# EAGLE board 130730_ReceiverSTM_0_0 (EAGLE 6.1)
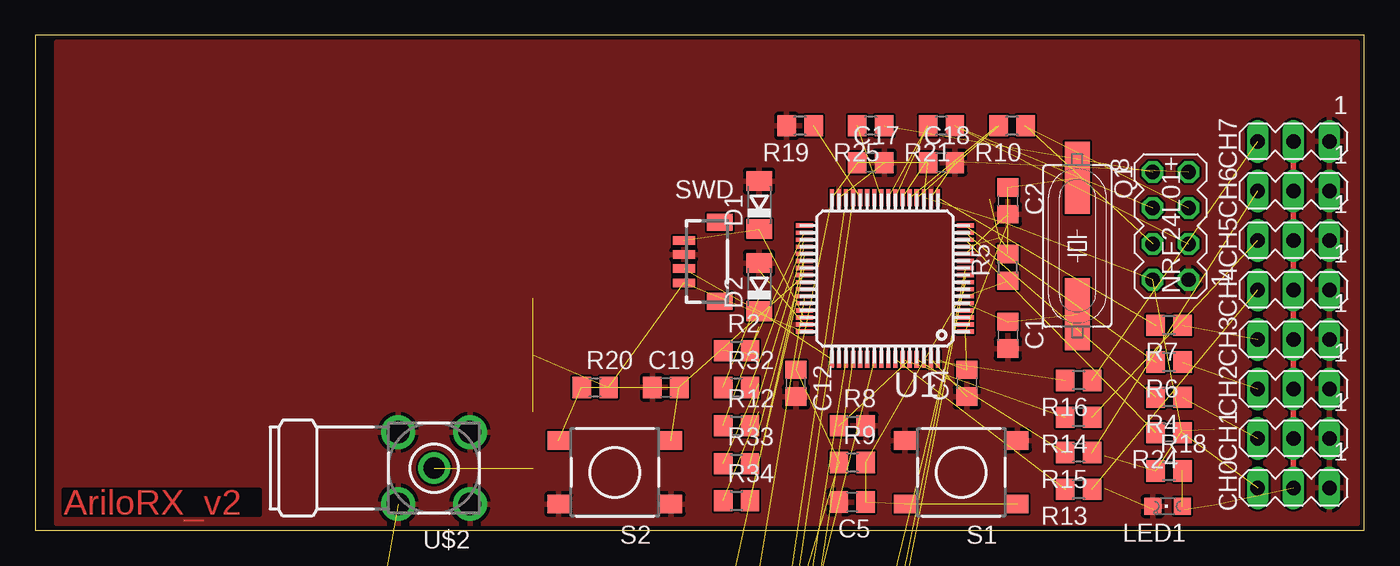
[diagram p0: board, top side]
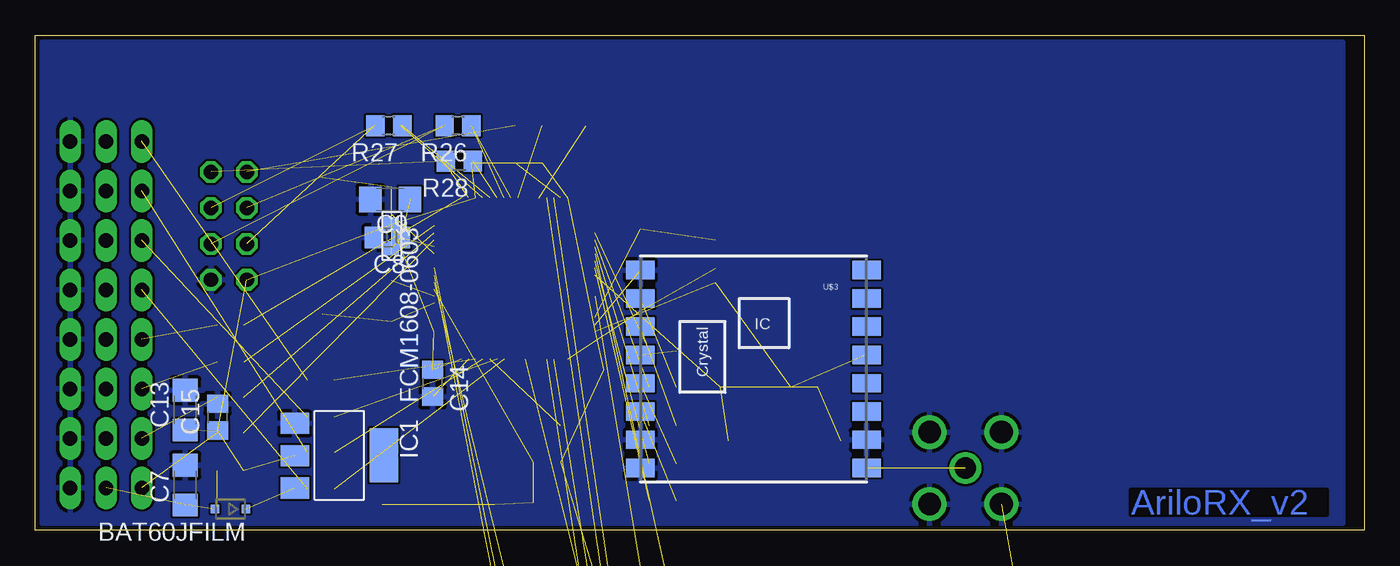
[diagram p1: board, bottom side, seen from below]

Size 94 x 35 mm. Coordinates in mm from the lower left corner, seen from the top.
Outline: 0,0 94,0 94,35 0,35 0,0
Copper layers (1*16): Top 0.035mm / dielectric 1.5mm / Bottom 0.035mm
Design rules: minimum track width 6mil, minimum drill 12mil, track to track 6mil, track to pad 6mil, pad to pad 6mil, via to via 6mil, smd to smd 0mil, copper to edge 10mil, drill to drill 10mil, minimum pad ring 10mil, minimum via ring 6mil, stop-mask expansion 2mil, vias tented up to drill 100mil, thermal gap 10mil

## Footprints (pad centres in the part's own frame; a part is rotated, then mirrored left to right if it is on the bottom)
SOT23-BEC = smd 1 x 1.4: B -0.95,-1.1; C 0,1.1; E 0.95,-1.1
SOD323-R = smd 0.6 x 0.6: A 1.1,0; C -1.1,0
C0805 = smd 1.3 x 1.5: 1 -0.95,0; 2 0.95,0
C3216 = smd 1.6 x 1.8: 1 -1.4,0; 2 1.4,0
MA03-1 = drill 1.016 long: 1 -2.54,0; 2 0,0; 3 2.54,0
SOD80C = smd 1.4 x 1.8: A 1.7,0; C -1.7,0
R0603 = smd 1 x 1.1: 1 -0.85,0; 2 0.85,0
BM03B-SRSS-TB = smd 0.6 x 1.55: 1 1,-1.625; 2 0,-1.625; 3 -1,-1.625 | smd 1.2 x 1.8: FIT@1 2.3,0.9; FIT@2 -2.3,0.9
BM05B-SRSS-TB = smd 0.6 x 1.55: 1 2,-1.625; 2 1,-1.625; 3 0,-1.625; 4 -1,-1.625; 5 -2,-1.625 | smd 1.2 x 1.8: FIT@1 3.3,0.9; FIT@2 -3.3,0.9
SOT223 = smd 1.499 x 2.007: 1 -2.261,-3.15; 2 0.025,-3.15; 3 2.311,-3.15 | smd 3.81 x 2.007: 4 0,3.15
CHIPLED_0805 = smd 1.2 x 1.2: A 0,-1.05; C 0,1.05
BM07B-SRSS-TB = smd 0.6 x 1.55: 1 3,-1.625; 2 2,-1.625; 3 1,-1.625; 4 0,-1.625; 5 -1,-1.625; 6 -2,-1.625; 7 -3,-1.625 | smd 1.2 x 1.8: FIT@1 4.3,0.9; FIT@2 -4.3,0.9
MA04-2 = drill 1.016 octagon: 1 -3.81,-1.27; 2 -3.81,1.27; 3 -1.27,-1.27; 4 -1.27,1.27; 5 1.27,-1.27; 6 1.27,1.27; 7 3.81,-1.27; 8 3.81,1.27
SM49 = smd 5.08 x 1.778: 1 -4.826,0; 2 4.826,0
R0805 = smd 1.3 x 1.5: 1 -0.95,0; 2 0.95,0
DTSM-6 = smd 1.55 x 1.3: 1 -3.975,2.25; 2 3.975,2.25; 3 -3.975,-2.25; 4 3.975,-2.25
BM04B-SRSS-TB = smd 0.6 x 1.55: 1 1.5,-1.625; 2 0.5,-1.625; 3 -0.5,-1.625; 4 -1.5,-1.625 | smd 1.2 x 1.8: FIT@1 2.8,0.9; FIT@2 -2.8,0.9
TQFP64 = smd 1.2 x 0.3: 1 -5.7,3.75; 2 -5.7,3.25; 3 -5.7,2.75; 4 -5.7,2.25; 5 -5.7,1.75; 6 -5.7,1.25; 7 -5.7,0.75; 8 -5.7,0.25; 9 -5.7,-0.25; 10 -5.7,-0.75; 11 -5.7,-1.25; 12 -5.7,-1.75; 13 -5.7,-2.25; 14 -5.7,-2.75; 15 -5.7,-3.25; 16 -5.7,-3.75; 33 5.7,-3.75; 34 5.7,-3.25; 35 5.7,-2.75; 36 5.7,-2.25; 37 5.7,-1.75; 38 5.7,-1.25; 39 5.7,-0.75; 40 5.7,-0.25; 41 5.7,0.25; 42 5.7,0.75; 43 5.7,1.25; 44 5.7,1.75; 45 5.7,2.25; 46 5.7,2.75; 47 5.7,3.25; 48 5.7,3.75 | smd 0.3 x 1.2: 17 -3.75,-5.7; 18 -3.25,-5.7; 19 -2.75,-5.7; 20 -2.25,-5.7; 21 -1.75,-5.7; 22 -1.25,-5.7; 23 -0.75,-5.7; 24 -0.25,-5.7; 25 0.25,-5.7; 26 0.75,-5.7; 27 1.25,-5.7; 28 1.75,-5.7; 29 2.25,-5.7; 30 2.75,-5.7; 31 3.25,-5.7; 32 3.75,-5.7; 49 3.75,5.7; 50 3.25,5.7; 51 2.75,5.7; 52 2.25,5.7; 53 1.75,5.7; 54 1.25,5.7; 55 0.75,5.7; 56 0.25,5.7; 57 -0.25,5.7; 58 -0.75,5.7; 59 -1.25,5.7; 60 -1.75,5.7; 61 -2.25,5.7; 62 -2.75,5.7; 63 -3.25,5.7; 64 -3.75,5.7
BU-SMA-H = drill 1.5: 1 0,0 | drill 1.6: 2 -2.54,2.54; 3 2.54,2.54; 4 2.54,-2.54; 5 -2.54,-2.54
RFM22-XXX-S2 = smd 2 x 1.3: 1 -8,7; 2 -8,5; 3 -8,3; 4 -8,1; 5 -8,-1; 6 -8,-3; 7 -8,-5; 8 -8,-7; 9 8,-7; 10 8,-5; 11 8,-3; 12 8,-1; 13 8,1; 14 8,3; 15 8,5; 16 8,7

## Placement (x,y rotation side)
2N2222  [SOT23-BEC]  -20.7,-435.9 0 top  (outside the outline)
BAT60JFILM  [SOD323-R]  80.2,1.5 180 bottom
C1  20pF  [C0805]  68.8,13.8 270 top
C2  20pF  [C0805]  68.8,23.3 270 top
C4  100nF  [C0805]  65.9,10.4 90 top
C5  100nF  [C0805]  57.8,2 180 top
C6  100nF  [C0805]  -21.1,-256.7 0 top  (outside the outline)
C7  10uF  [C3216]  83.4,3.2 90 bottom
C8  100nF  [C0805]  69.1,20.7 180 bottom
C9  1uF  [C3216]  68.9,23.4 180 bottom
C10  4.7nF  [C0805]  -21.1,-299.4 0 top  (outside the outline)
C11  4.7nF  [C0805]  -21.1,-305.5 0 top  (outside the outline)
C12  100nF  [C0805]  53.8,10.4 270 top
C13  10uF  [C3216]  83.4,8.5 90 bottom
C14  100nF  [C0805]  65.9,10.4 270 bottom
C15  100nF  [C0805]  81.1,8 90 bottom
C17  100nF  [C0805]  59.1,26 0 top
C18  100nF  [C0805]  64.1,26 0 top
C19  100nF  [C0805]  44.6,10.1 0 top
C20  4.7nF  [C0805]  -21.1,-323.8 0 top  (outside the outline)
C21  4.7nF  [C0805]  -21.1,-329.9 0 top  (outside the outline)
C22  1nF  [C0805]  -21.1,-355.4 0 top  (outside the outline)
CH0  [MA03-1]  89,3 180 top
CH1  [MA03-1]  89,6.5 180 top
CH2  [MA03-1]  89,10 180 top
CH3  [MA03-1]  89,13.5 180 top
CH4  [MA03-1]  89,17 180 top
CH5  [MA03-1]  89,20.5 180 top
CH6  [MA03-1]  89,24 180 top
CH7  [MA03-1]  89,27.5 180 top
D1  Z5V1  [SOD80C]  51.2,23 90 top
D2  Z5V1  [SOD80C]  51.2,17.2 90 top
FCM1608-0603  [R0603]  68.8,20.8 270 bottom
HALL1  BM03B-SRSS-TB  [BM03B-SRSS-TB]  -17.5,-360.9 0 top  (outside the outline)
HALL2  BM03B-SRSS-TB  [BM03B-SRSS-TB]  -17.5,-377.1 0 top  (outside the outline)
I_T_V  BM05B-SRSS-TB  [BM05B-SRSS-TB]  -16.3,-393.3 0 top  (outside the outline)
IC1  REG1117  [SOT223]  72.5,5.3 270 bottom
IMU_DROTEK  BM05B-SRSS-TB  [BM05B-SRSS-TB]  -16.3,-490.8 0 top  (outside the outline)
LED1  LED0805  [CHIPLED_0805]  80.1,1.7 90 top
MAXSONAR  BM07B-SRSS-TB  [BM07B-SRSS-TB]  -15.6,-452.4 0 top  (outside the outline)
NL-652ETTL  BM05B-SRSS-TB  [BM05B-SRSS-TB]  -16.3,-474.6 0 top  (outside the outline)
NRF24L01+  [MA04-2]  80.31,21.53 90 top
Q1  8MHz  [SM49]  73.7,20.1 270 top
R1  1K  [R0805]  -21.1,-440.8 0 top  (outside the outline)
R2  510R  [R0805]  49.6,12.7 0 top
R3  4.7K  [R0805]  -21.1,-513.6 0 top  (outside the outline)
R4  1K  [R0805]  80.2,9.4 180 top
R5  220R  [R0805]  68.8,18.6 90 top
R6  1K  [R0805]  80.2,11.9 180 top
R7  1K  [R0805]  80.2,14.5 180 top
R8  510R  [R0805]  57.8,7.4 0 top
R9  10K  [R0805]  57.8,4.8 0 top
R10  510R  [R0805]  69.1,28.6 180 top
R11  4.7K  [R0805]  -21.1,-507.5 0 top  (outside the outline)
R12  510R  [R0805]  49.6,7.4 0 top
R13  1K  [R0805]  73.8,2.9 180 top
R14  1K  [R0805]  73.8,8 180 top
R15  1K  [R0805]  73.8,5.5 180 top
R16  1K  [R0805]  73.8,10.6 180 top
R17  4.7K  [R0805]  -21.1,-446.9 0 top  (outside the outline)
R18  10K  [R0805]  80.2,4.2 0 top
R19  510R  [R0805]  54.1,28.6 180 top
R20  10K  [R0805]  39.6,10.1 0 top
R21  510R  [R0805]  64.1,28.6 180 top
R22  1.2K  [R0805]  -21.1,-317.7 0 top  (outside the outline)
R23  1.2K  [R0805]  -21.1,-311.6 0 top  (outside the outline)
R24  1K  [R0805]  80.2,6.9 180 top
R25  510R  [R0805]  59.1,28.6 180 top
R26  510R  [R0805]  64.1,28.6 180 bottom
R27  510R  [R0805]  69,28.6 180 bottom
R28  510R  [R0805]  64,26.1 180 bottom
R29  50K  [R0805]  -21.1,-343.2 0 top  (outside the outline)
R30  10K  [R0805]  -21.1,-349.3 0 top  (outside the outline)
R31  1K  [R0805]  -21.1,-469.1 0 top  (outside the outline)
R32  510R  [R0805]  49.6,10.1 0 top
R33  510R  [R0805]  49.6,4.7 0 top
R34  510R  [R0805]  49.6,2.1 0 top
S1  DTSM-6  [DTSM-6]  65.5,4.1 180 top
S2  DTSM-6  [DTSM-6]  41,4.1 180 top
SWD  BM04B-SRSS-TB  [BM04B-SRSS-TB]  47.5,19 270 top
U1  STM32F10XRXT6  [TQFP64]  60.1,17.8 180 top
U$2  RF-SMA  [BU-SMA-H]  28.2,4.4 180 top
U$3  RFM22SMD  [RFM22-XXX-S2]  43.2,11.4 180 bottom

## Library data of the parts
2N2222 = transistor
BAT60JFILM D1 D2 = diode
C1 C2 C4-C6 C8 C10-C12 C14 C15 C17-C22 = rcl
C7 C9 C13 = resistor
CH0 CH1-CH7 NRF24L01+ = con-lstb; OC_FARNELL: unknown; OC_NEWARK: unknown
FCM1608-0603 U$2 = BaseApp
HALL1 HALL2 I_T_V IMU_DROTEK MAXSONAR NL-652ETTL SWD = con-jst2
IC1 LED1 R1-R34 = CEDT
Q1 = crystal; OC_FARNELL: unknown; OC_NEWARK: unknown
S1 S2 = switch-tact
U1 = stm32
U$3 = SparkFun-RF

## Nets
ACS758_S: I_T_V.5 U1.10
ADC123_IN13: U1.11
BOOT1: R19.1 U1.28
CAN_RX: U1.44
CAN_TX: U1.45
CH0: R24.2 U1.14
CH1: R4.2 U1.15
CH2: R6.2 U1.16
CH3: R7.2 U1.17
CH4: R13.2 U1.58
CH5: R14.2 U1.59
CH6: R15.2 U1.61
CH7: R16.2 U1.62
GND: 2N2222.E C1.2 C2.2 C4.1 C5.2 C6.2 C7.2 C8.2 C9.2 C10.2 C11.1 C12.2 C13.2 C14.2 C15.2 C17.2 C18.2 C19.1 C20.2 C21.1 C22.2 CH0.1 CH1.1 CH2.1 CH3.1 CH4.1 CH5.1 CH6.1 CH7.1 D1.A D2.A HALL1.2 HALL2.2 I_T_V.3 IC1.1 IMU_DROTEK.1 LED1.C MAXSONAR.1 MAXSONAR.7 NL-652ETTL.2 NL-652ETTL.3 NRF24L01+.1 R8.2 R19.2 R30.2 S1.3 S1.4 S2.1 S2.2 SWD.3 U1.12 U1.18 U1.31 U1.47 U1.63 U$2.2 U$2.3 U$2.4 U$2.5 U$3.2 U$3.9 U$3.15 U$3.16
HOPERF_CSN: R33.2 U1.38
HOPERF_IRQ: R34.2 U1.39
I2C2_SCL: IMU_DROTEK.4 R3.2 U1.29
I2C2_SDA: IMU_DROTEK.5 R11.1 U1.30
INP_1: C19.2 R20.1 S2.3 S2.4 U1.40
N$1: C1.1 Q1.2 U1.5
N$2: R5.1 U1.6
N$3: C2.1 Q1.1 R5.2
N$4: R8.1 U1.60
N$5: U$3.3 U$3.7
N$6: U$3.4 U$3.6
N$7: R2.1 U$3.12
N$8: R12.1 U$3.11
N$9: CH0.3 R24.1
N$10: LED1.A R18.2
N$11: NL-652ETTL.5 R31.1
N$12: R32.1 U$3.10
N$13: BAT60JFILM.C IC1.3
N$14: MAXSONAR.3 R1.1
N$15: C22.1 I_T_V.2 R29.2
N$16: 2N2222.B R1.2
N$17: C8.1 C9.1 FCM1608-0603.2 U1.13
N$18: NRF24L01+.4 R10.1
N$19: NRF24L01+.3 R26.2
N$20: U$2.1 U$3.1
N$21: CH2.3 R6.1
N$22: R34.1 U$3.14
N$23: CH4.3 R13.1
N$24: R33.1 U$3.13
N$31: CH3.3 R7.1
N$32: CH6.3 R15.1
N$34: CH5.3 R14.1
N$35: CH7.3 R16.1
N$36: NRF24L01+.5 R27.2
N$38: NRF24L01+.6 R21.1
N$39: NRF24L01+.8 R25.1
N$42: NRF24L01+.7 R28.2
N$53: CH1.3 R4.1
NRF_CE: R26.1 U1.24
NRF_CSN: R10.2 U1.20
NRF_IRQ: R25.2 U1.25
NSRST: C5.1 R9.2 S1.1 S1.2 U1.7
SPI1_MISO: R28.1 U1.22
SPI1_MOSI: R21.2 U1.23
SPI1_SCK: R27.1 U1.21
SPI2_MISO: R32.2 U1.35
SPI2_MOSI: R12.2 U1.36
SPI2_NSS: U1.33
SPI2_SCK: R2.2 U1.34
SWCLK: D2.C SWD.2 U1.49
SWDIO: D1.C SWD.4 U1.46
TEMP_S: I_T_V.1 U1.9
TIM3_CH1: C11.2 HALL2.3 R23.2 U1.55
TIM8_CH1: C21.2 HALL1.3 R22.2 U1.37
USART1_CK: U1.41
USART1_RX: 2N2222.C R17.2 U1.43
USART1_TX: U1.42
USART3_CK: U1.53
USART3_RX: NL-652ETTL.4 U1.52
USART3_TX: R31.2 U1.51
V+: BAT60JFILM.A C7.1 CH0.2 CH1.2 CH2.2 CH3.2 CH4.2 CH5.2 CH6.2 CH7.2
VBAT_S: R29.1 R30.1 U1.8
VCC: C4.2 C6.1 C10.1 C12.1 C13.1 C14.1 C15.1 C17.1 C18.1 C20.1 FCM1608-0603.1 HALL1.1 HALL2.1 I_T_V.4 IC1.2 IMU_DROTEK.3 MAXSONAR.2 MAXSONAR.4 NL-652ETTL.1 NRF24L01+.2 R3.1 R9.1 R11.2 R17.1 R18.1 R20.2 R22.1 R23.1 SWD.1 U1.1 U1.19 U1.32 U1.48 U1.64 U$3.5

## Tracks (layer width: path | path; a pad name or v marks a point on that pad's centre or on a via)
ACS758_S  (1 unrouted)
BOOT1  (1 unrouted)
CH0  (1 unrouted)
CH1  (1 unrouted)
CH2  (1 unrouted)
CH3  (1 unrouted)
CH4  (1 unrouted)
CH5  (1 unrouted)
CH6  (1 unrouted)
CH7  (1 unrouted)
GND  (21 unrouted)
  pour Top: 1.5,34.5 93.5,34.5 93.5,0.5 1.5,0.5
  pour Bottom: 1.5,34.5 93.5,34.5 93.5,0.5 1.5,0.5
HOPERF_CSN  (1 unrouted)
HOPERF_IRQ  (1 unrouted)
I2C2_SCL  (2 unrouted)
I2C2_SDA  (2 unrouted)
INP_1  (4 unrouted)
N$1  (2 unrouted)
N$2  (1 unrouted)
N$3  (2 unrouted)
N$4  (1 unrouted)
N$5  (1 unrouted)
N$6  (1 unrouted)
N$7  (1 unrouted)
N$8  (1 unrouted)
N$9  (1 unrouted)
N$10  (1 unrouted)
N$11  (1 unrouted)
N$12  (1 unrouted)
N$13  (1 unrouted)
N$14  (1 unrouted)
N$15  (2 unrouted)
N$16  (1 unrouted)
N$17  (3 unrouted)
N$18  (1 unrouted)
N$19  (1 unrouted)
N$20  (1 unrouted)
N$21  (1 unrouted)
N$22  (1 unrouted)
N$23  (1 unrouted)
N$24  (1 unrouted)
N$31  (1 unrouted)
N$32  (1 unrouted)
N$34  (1 unrouted)
N$35  (1 unrouted)
N$36  (1 unrouted)
N$38  (1 unrouted)
N$39  (1 unrouted)
N$42  (1 unrouted)
N$53  (1 unrouted)
NRF_CE  (1 unrouted)
NRF_CSN  (1 unrouted)
NRF_IRQ  (1 unrouted)
NSRST  (4 unrouted)
SPI1_MISO  (1 unrouted)
SPI1_MOSI  (1 unrouted)
SPI1_SCK  (1 unrouted)
SPI2_MISO  (1 unrouted)
SPI2_MOSI  (1 unrouted)
SPI2_SCK  (1 unrouted)
SWCLK  (2 unrouted)
SWDIO  (2 unrouted)
TEMP_S  (1 unrouted)
TIM3_CH1  (3 unrouted)
TIM8_CH1  (3 unrouted)
USART1_RX  (2 unrouted)
USART3_RX  (1 unrouted)
USART3_TX  (1 unrouted)
V+  (2 unrouted)
  Top 0.406: CH7.2 CH6.2 CH5.2 CH4.2 CH3.2 CH2.2 CH1.2 CH0.2
VBAT_S  (2 unrouted)
VCC  (34 unrouted)

## Text on the board
Top: AriloRX_v2
Bottom: AriloRX_v2